# Altium PCB motion_tracker.PcbDoc
Units mil, origin at the board's own origin, x right, y up, seen from the top; angles counter-clockwise.
Board outline 1985 x 1590 mil, 2 copper layers (Top Layer, Bottom Layer); 37 components, 22 nets, 155 pads, 73 vias.
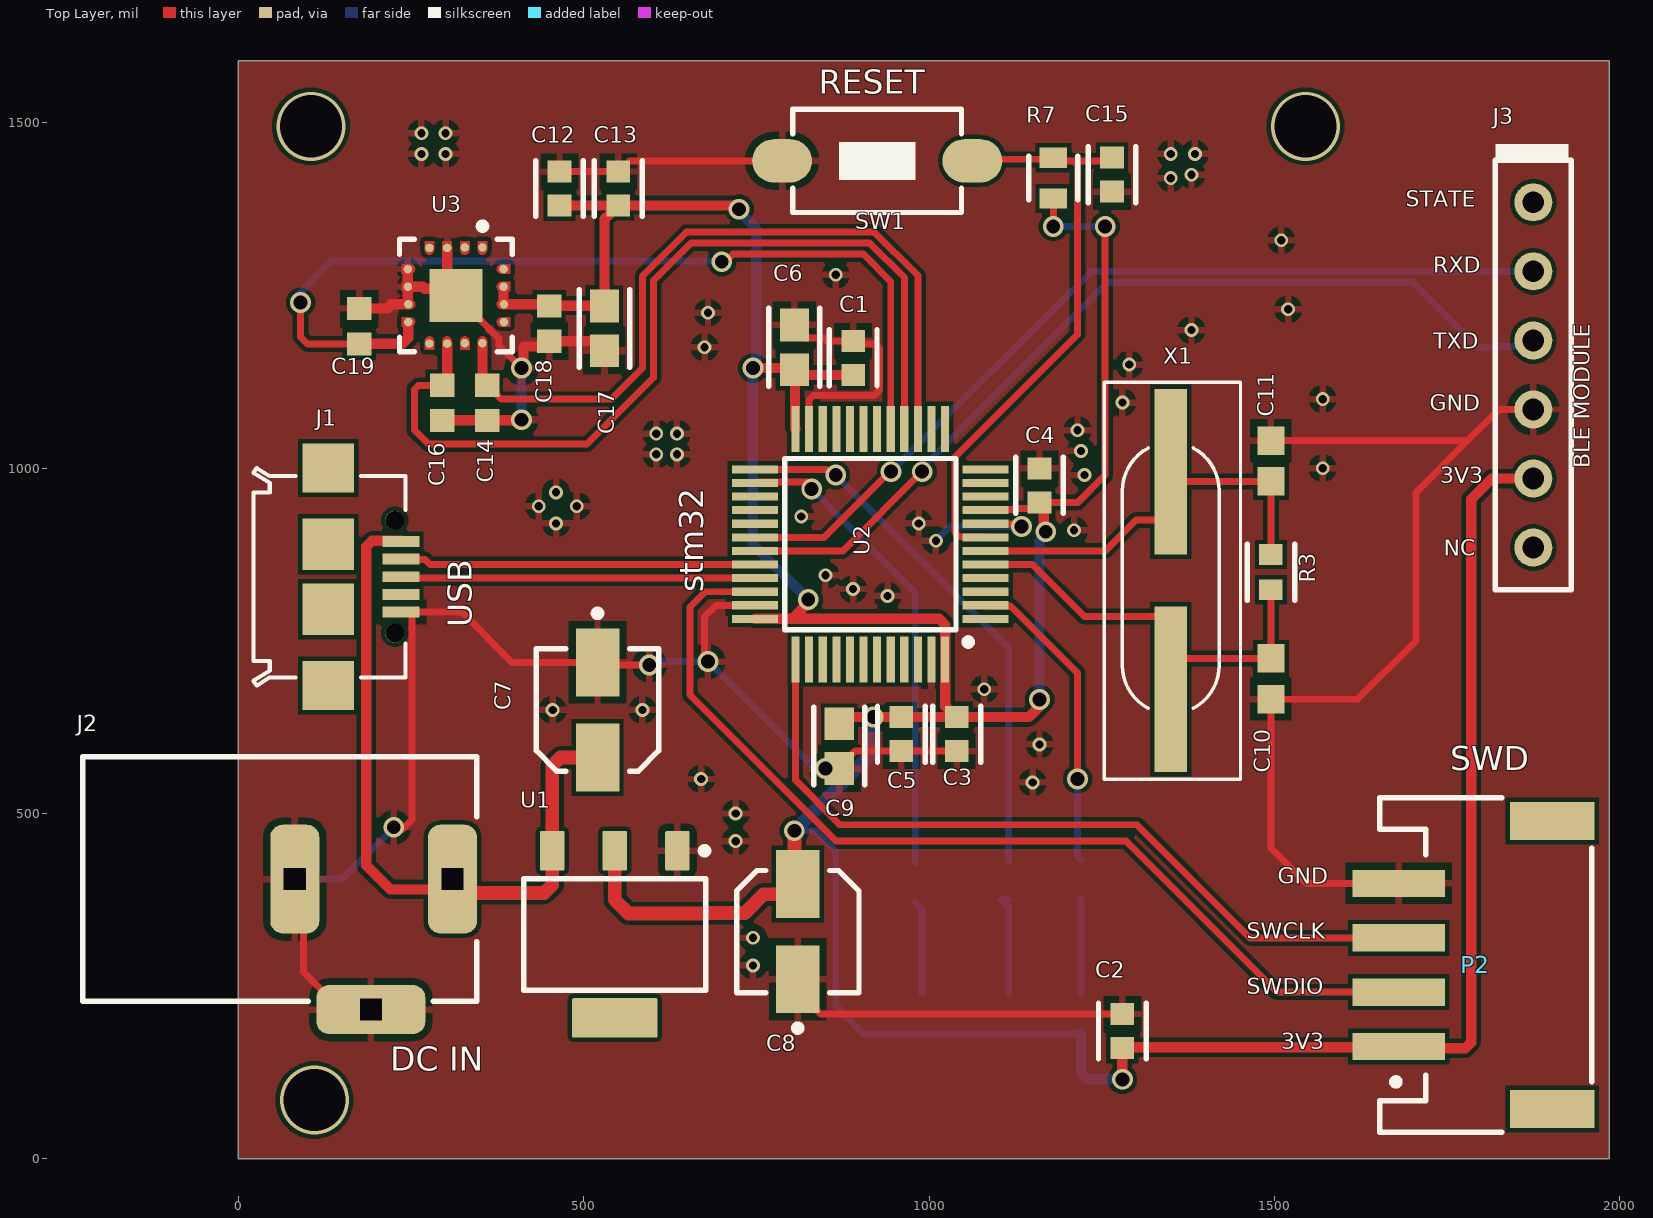
[diagram p0: Top Layer view]
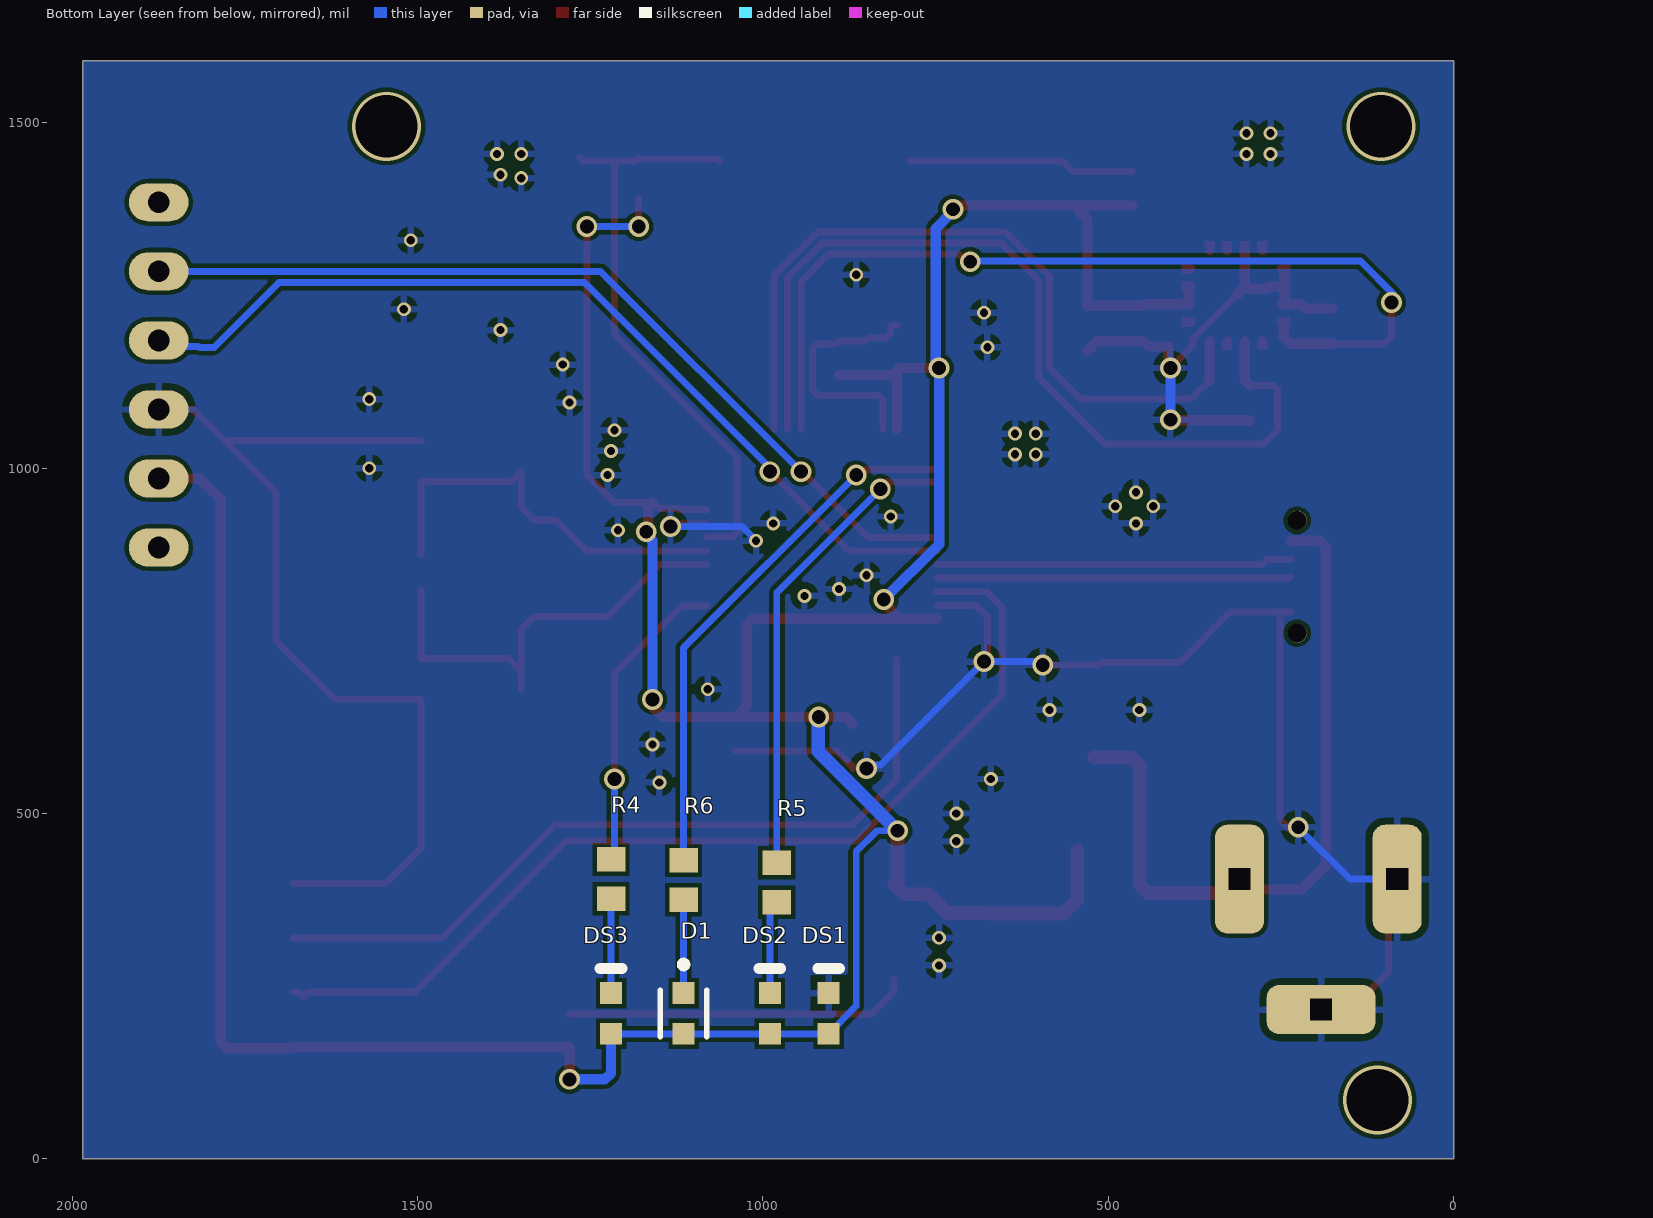
[diagram p1: Bottom Layer view, seen from below]

## Layer stack, top to bottom
Top Solder: solder mask 0.4, Solder Resist, Dk 3.5
Top Layer: signal copper 1.4
Dielectric 1: dielectric 12.6, FR-4, Dk 4.8
Bottom Layer: signal copper 1.4
Bottom Solder: solder mask 0.4, Solder Resist, Dk 3.5

## Board outline
0,0 1985,0 1985,1590 0,1590

## Design rules (kind name [scope] priority, off if disabled: settings)
Clearance [All] p1: gap=6 ignorepadtopadclearanceinfootprint=TRUE
DiffPairsRouting [InDifferentialPairClass('diff_90')] p1: maxlimit=10 minlimit=5 mostfreqgap=5 toplayer_minwidth=10 toplayer_maxwidth=10 toplayer_prefwidth=10 bottomlayer_minwidth=10 bottomlayer_maxwidth=10 bottomlayer_prefwidth=10 maxuncoupledlength=500
PolygonConnect [All] p1: connectstyle=Relief reliefconductorwidth=10 reliefentries=4 polygonreliefangle="90 Angle" airgapwidth=10
RoutingVias [All] p1: holewidth=20 width=30 viastyle="Through Hole" minholewidth=20 minwidth=30 maxholewidth=20 maxwidth=30
SolderMaskExpansion [All] p1: expansion=4 istentingtop=FALSE
Width [All] p1: maxlimit=50 minlimit=6 preferedwidth=10
29 further rules are at their usual default settings.

## Classes and differential pairs
differential pair class diff_90: USBD
net class diff_90: USBD_N USBD_P
differential pair USBD: +USBD_P -USBD_N

## Components (designator, comment, footprint, x,y, rotation, side; value= is the part's Value field where it differs from the comment)
C1 "100nF" FP-0603-L_1_6_0_15-W_0_81-IPC_C 890,1159.64 r90 top
C2 "100nF" FP-0603-L_1_6_0_15-W_0_81-IPC_C 1280,185 r90 top
C3 "100nF" FP-0603-L_1_6_0_15-W_0_81-IPC_C 1040,615 r270 top
C4 "100nF" FP-0603-L_1_6_0_15-W_0_81-IPC_C 1160,975 r90 top
C5 "100nF" FP-0603-L_1_6_0_15-W_0_81-IPC_C 960,615 r270 top
C6 "4.7uF" FP-0603-L_1_6_0_15-W_0_81-IPC_A 805,1175 r90 top
C7 "EEEFP1C100AR" FP-FPB-MFG 520,650 r270 top
C8 "EEEFP1C100AR" FP-FPB-MFG 810,328.9 r90 top
C9 "4.7uF" FP-0603-L_1_6_0_15-W_0_81-IPC_A 870,597.49 r270 top
C10 "20pF" CAPC1608X90X35NL15T15 1495,695 r90 top
C11 "20pF" CAPC1608X90X35NL15T15 1495,1010.47 r270 top
C12 "10nF" FP-0603-L_1_6_0_15-W_0_81-IPC_C 465,1405 r270 top
C13 "1uF" FP-0603-L_1_6_0_15-W_0_81-IPC_C 550,1405 r270 top
C14 "0.1uF" CAPC1608X90X35LL15T15 360,1094.41 r90 top
C15 "105uF" FP-0603-L_1_6_0_15-W_0_81-IPC_C 1265,1425 r270 top
C16 "0.1uF" CAPC1608X90X35LL15T15 295,1094.41 r90 top
C17 "4.7uF" FP-0603-L_1_6_0_15-W_0_81-IPC_A 530,1202.49 r270 top
C18 "0.1uF" CAPC1608X90X35LL15T15 450,1209.41 r90 top
C19 "0.1uF" CAPC1608X90X35LL15T15 175,1205.59 r270 top
D1 "GREEN" FP-LTST-C190GKT-MFG 1115,210.47 r270 bottom
DS1 "POWER" AVAG-HSMX-C190_V 905,210.47 r90 bottom
DS2 "Yellow" AVAG-HSMX-C190_V 990,210.47 r90 bottom
DS3 "POWER" AVAG-HSMX-C190_V 1220,210.47 r90 bottom
J1 "Micro USB 2.0 Type B" 629105136821 130,842.76 r270 top
J2 "694106301002" 694106301002 60,405 r270 top
J3 "HDRF6" HDRLP_F_1X6 1875,1135 r270 top
P2 "620104131822" 620104131822 1805.98,280.63 r90 top
R3 "1M" FP-ERJ3EK-IPC_C 1495,849.38 r270 top
R4 "510R" RESC1608X55X30ML15T15 1220,405 r90 bottom
R5 "510R" RESC1608X55X30ML15T15 980,400 r90 bottom
R6 "510R" RESC1608X55X30ML15T15 1115,403.54 r90 bottom
R7 "10K" FP-CRCW0603-HPe3-MFG 1180,1420 r270 top
SW1 "Tactile 2PIN 6X3.5mm H4.57mm (SMD)" SWPBS_SPST_6X3X5 925,1445 r0 top
U1 "LM1117MPX-3.3/NOPB" DCY0004A_L 545,325 r270 top
U2 "STM32F103C8T6" LQFP-48_19.6_393_58X11_SMD 915,890 r180 top
U3 "ADXL335BCPZ-RL7" FP-CP-16-14-MFG 315,1250 r270 top
X1 "8Mhz" XTAL_314_240X47_SMD 1350,994.96 r270 top

## Footprints (in the part's own frame and the unit in brackets; to place one, negate y for a bottom-side part, rotate by r counter-clockwise, add the part's x,y. Pads: shape width x height; smd on the part's side, far side on the other; paste and mask are expansions set on the pad)
620104131822 [mm] "2.00mm SMT Male Horizontal Shrouded Header, 4p"
  rect 1x3.4 smd: 1(-3,3.2) 2(-1,3.2) 3(1,3.2) 4(3,3.2)
  rect 1.4x3.1 smd: MP1(-5.3,-2.45) MP2(5.3,-2.45)
  silkscreen extent -6.15,-3.9 6.15,3.9, body extent -6,-3.8 6,4.8, height 5.57
629105136821 [mm] "Micro USB 2.0 SMT Type B Horizontal 5 Contacts"
  rect 0.4x1.35 smd: 1(-1.3,2.675) 2(-0.65,2.675) 3(0,2.675) 4(0.65,2.675) 5(1.3,2.675)
  round 0.7 hole 0.7 unplated: M1(-2.075,2.45) M2(2.075,2.45)
  rect 1.8x1.9 smd: S1(-4,0) S4(4,0)
  rect 1.9x1.9 smd: S2(-1.2,0) S3(1.2,0)
  silkscreen extent -4,-2.75 4,2.85, body extent -4,-2.73 4,3.17, height 2.77
694106301002 [mm] "DC Power Jack Right Angled(6.4)"
  rrect50% 4x1.8 hole 0.8 square: 1(0,6.35) 2(0,0.55)
  rrect50% 1.8x4 hole 0.8 square: 3(4.8,3.35)
  silkscreen extent -4.5,-7.25 4.5,7.25, body extent -4.5,-7.25 5,7.25, height 10.75
AVAG-HSMX-C190_V [mm] "SMD, 2-Leads, Body 1.6x0.8mm, Height 0.9mm"
  rect 0.8x0.8 smd: 1(-0.75,0) 2(0.75,0)
  silkscreen extent 1.65,-0.4 1.65,0.4, body extent -0.8,-0.4 0.8,0.4, height 0.9
CAPC1608X90X35LL15T15 [mm] "Chip Capacitor, 2-Leads, Body 1.60x0.81mm, IPC High Density"
  rect 0.85x0.9 smd: 1(-0.65,0) 2(0.65,0)
  body extent -0.88,-0.48 0.87,0.48, height 0.9
CAPC1608X90X35NL15T15 [mm] "Chip Capacitor, 2-Leads, Body 1.60x0.81mm, IPC Medium Density"
  rect 1.05x1 smd: 1(-0.75,0) 2(0.75,0)
  body extent -0.88,-0.48 0.87,0.48, height 0.9
DCY0004A_L [mm] "SOT223, 4-Leads, Body 6.7x3.7mm, Pitch 2.3mm, IPC High Density"
  rrect11% 1.45x0.9 smd: 1(-3.075,2.3) 2(-3.075,0) 3(-3.075,-2.3)
  rrect7% 1.45x3.15 smd: 4(3.075,0)
  silkscreen extent -3.2,-3.35 2.05,3.43, body extent -3.5,-3.25 3.5,3.25, height 1.62
FP-0603-L_1_6_0_15-W_0_81-IPC_A [mil]
  rect 47.5x42.06 smd paste+0 mask+0: 1(-32.51,0) 2(32.51,0)
  silkscreen extent -56,-37 56,37, body extent -76,-41 76,41, height 10
FP-0603-L_1_6_0_15-W_0_81-IPC_C [mil]
  rect 31.75x34.18 smd paste+0 mask+0: 1(-24.64,0) 2(24.64,0)
  silkscreen extent -41,-35 41,35, body extent -44,-23 44,23, height 10
FP-CP-16-14-MFG [mm]
  round 0.315 smd paste+0 mask+0: 1(-1.767,0.975) 2(-1.767,0.325) 3(-1.75,-0.325) 4(-1.75,-0.975) 5(-0.975,-1.767) 6(-0.325,-1.767) 7(0.325,-1.75) 8(0.975,-1.75) 9(1.767,-0.975) 10(1.767,-0.325) 11(1.75,0.325) 12(1.75,0.975) 13(0.975,1.767) 14(0.325,1.767) 15(-0.325,1.75) 16(-0.975,1.75)
  rect 1.95x1.95 smd paste+0 mask+0: 17(0,0)
  Top Layer region: -0.8,2 -0.8,1.675 -0.813,1.608 -0.851,1.551 -0.908,1.513 -0.975,1.5 -0.975,1.5 -1.042,1.513 -1.099,1.551 -1.137,1.608 -1.15,1.675 -1.15,1.675 -1.15,2
  Top Layer region: -0.15,2 -0.15,1.675 -0.173,1.587 -0.238,1.523 -0.325,1.5 -0.325,1.5 -0.392,1.513 -0.449,1.551 -0.487,1.608 -0.5,1.675 -0.5,1.675 -0.5,2
  Top Layer region: 0.5,2 0.5,1.675 0.477,1.587 0.413,1.523 0.325,1.5 0.325,1.5 0.258,1.513 0.201,1.551 0.163,1.608 0.15,1.675 0.15,1.675 0.15,2
  Top Layer region: 1.15,2 1.15,1.675 1.127,1.588 1.062,1.523 0.975,1.5 0.975,1.5 0.908,1.513 0.851,1.551 0.813,1.608 0.8,1.675 0.8,1.675 0.8,2
  Top Layer region: 2,0.8 1.675,0.8 1.608,0.813 1.551,0.851 1.513,0.908 1.5,0.975 1.5,0.975 1.513,1.042 1.551,1.099 1.608,1.137 1.675,1.15 1.675,1.15 2,1.15
  Top Layer region: 2,0.15 1.675,0.15 1.608,0.163 1.551,0.201 1.513,0.258 1.5,0.325 1.5,0.325 1.513,0.392 1.551,0.449 1.608,0.487 1.675,0.5 1.675,0.5 2,0.5
  Top Layer region: 2,-0.5 1.675,-0.5 1.608,-0.487 1.551,-0.449 1.513,-0.392 1.5,-0.325 1.5,-0.325 1.513,-0.258 1.551,-0.201 1.608,-0.163 1.675,-0.15 1.675,-0.15 2,-0.15
  Top Layer region: 2,-1.15 1.675,-1.15 1.608,-1.137 1.551,-1.099 1.513,-1.042 1.5,-0.975 1.5,-0.975 1.513,-0.908 1.551,-0.851 1.608,-0.813 1.675,-0.8 1.675,-0.8 2,-0.8
  Top Layer region: 0.8,-2 0.8,-1.675 0.813,-1.608 0.851,-1.551 0.908,-1.513 0.975,-1.5 0.975,-1.5 1.042,-1.513 1.099,-1.551 1.137,-1.608 1.15,-1.675 1.15,-1.675 1.15,-2
  Top Layer region: 0.15,-2 0.15,-1.675 0.163,-1.608 0.201,-1.551 0.258,-1.513 0.325,-1.5 0.325,-1.5 0.392,-1.513 0.449,-1.551 0.487,-1.608 0.5,-1.675 0.5,-1.675 0.5,-2
  Top Layer region: -0.5,-2 -0.5,-1.675 -0.487,-1.608 -0.449,-1.551 -0.392,-1.513 -0.325,-1.5 -0.325,-1.5 -0.258,-1.513 -0.201,-1.551 -0.163,-1.608 -0.15,-1.675 -0.15,-1.675 -0.15,-2
  Top Layer region: -1.15,-2 -1.15,-1.675 -1.137,-1.608 -1.099,-1.551 -1.042,-1.513 -0.975,-1.5 -0.975,-1.5 -0.908,-1.513 -0.851,-1.551 -0.813,-1.608 -0.8,-1.675 -0.8,-1.675 -0.8,-2
  Top Layer region: -2,-0.8 -1.675,-0.8 -1.608,-0.813 -1.551,-0.851 -1.513,-0.908 -1.5,-0.975 -1.5,-0.975 -1.513,-1.042 -1.551,-1.099 -1.608,-1.137 -1.675,-1.15 -1.675,-1.15 -2,-1.15
  Top Layer region: -2,-0.15 -1.675,-0.15 -1.608,-0.163 -1.551,-0.201 -1.513,-0.258 -1.5,-0.325 -1.5,-0.325 -1.523,-0.413 -1.587,-0.477 -1.675,-0.5 -1.675,-0.5 -2,-0.5
  Top Layer region: -2,0.5 -1.675,0.5 -1.608,0.487 -1.551,0.449 -1.513,0.392 -1.5,0.325 -1.5,0.325 -1.523,0.238 -1.587,0.173 -1.675,0.15 -1.675,0.15 -2,0.15
  Top Layer region: -2,1.15 -1.675,1.15 -1.608,1.137 -1.551,1.099 -1.513,1.042 -1.5,0.975 -1.5,0.975 -1.513,0.908 -1.551,0.851 -1.608,0.813 -1.675,0.8 -1.675,0.8 -2,0.8
  silkscreen extent -2.67,-2.07 2.07,2.07, body extent -2.17,-2.17 2.17,2.17, height 0.25
FP-CRCW0603-HPe3-MFG [mm]
  rect 0.75x1 smd paste+0 mask+0: 1(-0.75,0) 2(0.75,0)
  silkscreen extent -0.8,-0.9 0.8,0.9, body extent -1.22,-0.6 1.22,0.6, height 0.25
FP-ERJ3EK-IPC_C [mil]
  rect 29.78x33.94 smd paste+0 mask+0: 1(-25.62,0) 2(25.62,0)
  silkscreen extent -41,-34 41,34, body extent -44,-23 44,23, height 10
FP-FPB-MFG [mm]
  rect 2.5x1.6 smd paste+0 mask+0: 1(-1.75,0) 2(1.75,0)
  silkscreen extent -3.67,-2.25 2.25,2.25, body extent -3.25,-2.5 3.25,2.5, height 0.25
FP-LTST-C190GKT-MFG [mm]
  rect 0.8x0.8 smd paste+0 mask+0: 1(-0.75,0) 2(0.75,0)
  silkscreen extent -1.92,-0.85 0.85,0.85, body extent -0.8,-0.4 0.8,0.4, height 0.9
HDRLP_F_1X6 [mm] "Connector Socket, Single-row 1-position, 0.100\" pitch"
  round 1.4 / inner round 1.4 / far side oval 1.4x2.2 hole 0.8 mask+0.1: 1(-6.35,0) 2(-3.81,0) 3(-1.27,0) 4(1.27,0) 5(3.81,0) 6(6.35,0)
  silkscreen extent -8.5,-1.4 7.9,1.4, body extent -7.81,-1.27 7.81,1.27, height 4.19
LQFP-48_19.6_393_58X11_SMD [mm] "48LQFP"
  rect 1.7x0.3 smd mask+0.076: 1(-4.238,2.75) 2(-4.238,2.25) 3(-4.238,1.75) 4(-4.238,1.25) 5(-4.238,0.75) 6(-4.238,0.25) 7(-4.238,-0.25) 8(-4.238,-0.75) 9(-4.238,-1.25) 10(-4.238,-1.75) 11(-4.238,-2.25) 12(-4.238,-2.75) 25(4.238,-2.75) 26(4.238,-2.25) 27(4.238,-1.75) 28(4.238,-1.25) 29(4.238,-0.75) 30(4.238,-0.25) 31(4.238,0.25) 32(4.238,0.75) 33(4.238,1.25) 34(4.238,1.75) 35(4.238,2.25) 36(4.238,2.75)
  rect 0.3x1.7 smd mask+0.076: 13(-2.75,-4.238) 14(-2.25,-4.238) 15(-1.75,-4.238) 16(-1.25,-4.238) 17(-0.75,-4.238) 18(-0.25,-4.238) 19(0.25,-4.238) 20(0.75,-4.238) 21(1.25,-4.238) 22(1.75,-4.238) 23(2.25,-4.238) 24(2.75,-4.238) 37(2.75,4.238) 38(2.25,4.238) 39(1.75,4.238) 40(1.25,4.238) 41(0.75,4.238) 42(0.25,4.238) 43(-0.25,4.238) 44(-0.75,4.238) 45(-1.25,4.238) 46(-1.75,4.238) 47(-2.25,4.238) 48(-2.75,4.238)
  silkscreen extent -3.73,-3.15 3.15,3.72, body extent -4.5,-4.5 4.5,4.5, height 1.7
RESC1608X55X30ML15T15 [mm] "Chip Resistor, 2-Leads, Body 1.60x0.80mm, IPC Low Density"
  rect 0.9x1.05 smd: 1(-0.725,0) 2(0.725,0)
  body extent -0.87,-0.48 0.87,0.48, height 0.55
SWPBS_SPST_6X3X5 [mm] "SWITCH, PUSHBUTTON, SMD, SPST, 6X3.5mm, SKQMBBE010, 50000 Cycles, 1.57N Force"
  oval 2.2x1.6 smd mask+0.1: 1(-3.5,0) 2(3.5,0)
  silkscreen extent -3.1,-1.9 3.1,1.9, body extent -3.65,-1.75 3.65,1.75, height 5
XTAL_314_240X47_SMD [mm] "CASE: TH"
  rect 6.096x1.2 smd: 1(0,0) 2(8,0)
  silkscreen extent -3.29,-2.44 11.32,2.57, body extent -2.99,-2.27 10.9,2.41, height 3.05

## Part data
C1 C2 C3 C4 C5: library part CMP-2006-04386-2, "Automotive Ceramic Capacitor, 0603, 100nF, 10%, X7R, 15%, 50V", Case Code (Imperial)=0603, Case Code (Metric)=1608, Dielectric=X7R, Dielectric Material=Ceramic, Insulation Resistance=100GR, Max Operating Temperature=125°C, Min Operating Temperature=-55°C, Package Quantity=1, Ratings=AEC-Q200, Tolerance=10%, Voltage=50V, Capacitance=100nF, Case/Package=0603, Construction=Flat, Contact Plating=Tin, Depth=0.81mm, Dissipation Factor=2.5%, Height=0.9mm, Lead Free="Lead Free", Length=1.6mm, Mount="Surface Mount", Number of Pins=2, Packaging="Tape and Reel", Radiation Hardening=No, REACH SVHC="No SVHC", RoHS Compliant=Yes, Series=-, Termination=SMD/SMT, Thickness=0.035inch, Voltage Rating=50V, Voltage Rating (DC)=50V, Width=0.032inch
C6 C9 C17: library part CMP-2006-04482-2, "General Purpose Ceramic Capacitor, 0603, 4.7uF, 20%, X5R, 15%, 6.3V", Case Code (Imperial)=0603, Case Code (Metric)=1608, Dielectric=X5R, Dielectric Material=Ceramic, Insulation Resistance=10GR, Max Operating Temperature=85°C, Min Operating Temperature=-55°C, Package Quantity=1, Tolerance=20%, Voltage=6.3V, Capacitance=4.7uF, Case/Package=0603, Construction=Flat, Contact Plating=Tin, Depth=0.81mm, Dissipation Factor=12.5%, Height=0.9mm, Lead Free="Lead Free", Length=1.6mm, Mount="Surface Mount", Number of Pins=2, Packaging="Tape and Reel", Radiation Hardening=No, REACH SVHC="No SVHC", RoHS Compliant=Yes, Series=-, Size=0.94mm, Termination=SMD/SMT, Thickness=0.035inch, Voltage Rating=6.3V, Voltage Rating (DC)=6.3V, Width=0.032inch
C7 C8: library part CMP-00287-07742837-1, "EEEFP1C100AR Aluminum Electrolytic Capacitor, 10 uF, 16 V, ± 20%, 2000 hours @ 105°C, Radial Can - SMD", Capacitance=10µF, Case/Package=Radial, ESR (Equivalent Series Resistance)=850mΩ, Leakage Current=3µA, Max Operating Temperature=105°C, Min Operating Temperature=-55°C, Ripple Current=160mA, Tolerance=20%, Voltage=16V, Contact Plating=Tin, Diameter=4mm, Dissipation Factor=16%, Features="High Temperature", Height=5.8mm, Height - Seated (Max)=5.7912mm, Lead Free="Lead Free", Lead Pitch=1mm, Length=6.1mm, Life (Hours)=2000hours, Lifecycle Status=Production, Material=Aluminium, Mount="PCB, Surface Mount", NexarPartId=7742837, Number of Pins=2, Packaging="Cut Tape", Radiation Hardening=No, REACH SVHC="No SVHC", Ripple Current (AC)=160mA, RoHS=Compliant, Schedule B="8532220020, 8532220020", Termination=SMD/SMT, Voltage Rating=16V, Voltage Rating (DC)=16V
C10 C11: library part CMP-2006-04264-1, Manufacturer="AVX Interconnect / Elco", Part Number=06035A200JAT2A
C12 C13 C15: library part CMP-2006-04386-2, "Automotive Ceramic Capacitor, 0603, 100nF, 10%, X7R, 15%, 50V", Capacitance=100nF, Case Code (Imperial)=0603, Case Code (Metric)=1608, Dielectric=X7R, Dielectric Material=Ceramic, Insulation Resistance=100GR, Max Operating Temperature=125°C, Min Operating Temperature=-55°C, Package Quantity=1, Ratings=AEC-Q200, Tolerance=10%, Voltage=50V, Case/Package=0603, Construction=Flat, Contact Plating=Tin, Depth=0.81mm, Dissipation Factor=2.5%, Height=0.9mm, Lead Free="Lead Free", Length=1.6mm, Mount="Surface Mount", Number of Pins=2, Packaging="Tape and Reel", Radiation Hardening=No, REACH SVHC="No SVHC", RoHS Compliant=Yes, Series=-, Termination=SMD/SMT, Thickness=0.035inch, Voltage Rating=50V, Voltage Rating (DC)=50V, Width=0.032inch
C14 C16 C18 C19: library part CMP-2006-02168-1, Manufacturer="AVX Interconnect / Elco", Part Number=LD035C104KAB2A
D1: library part CMP-22017-000005-2, "LED GREEN CLEAR CHIP SMD", Case Code (Imperial)=0603, Case Code (Metric)=1608, Color=Green, Forward Current=30mA, Forward Voltage=2.1V, Lens Color=Colorless, Max Operating Temperature=85°C, Min Operating Temperature=-55°C, Package Quantity=1, Power Dissipation=100mW, Reverse Voltage=5V, Test Current=10mA, Voltage=2V, Case/Package=0603, Depth=0.8mm, Dominant Wavelength=569nm, Height=0.8mm, Illumination Color=Green, Lead Free="Lead Free", Length=1.6mm, Lens Style=Clear, Lens Transparency=Clear, Luminous Intensity=6mcd, Mount="Surface Mount", Number of Elements=1, Number of LEDs=1, Number of Pins=2, Packaging="Tape and Reel", Power Rating=100mW, Radiation Hardening=No, Viewing Angle=130°, Wavelength=565nm, Width=0.8mm
DS1 DS3: library part CMP-2000-06427-1, "LED Uni-Color Red, 52 mW, 20 mA, -40 to 85 degC, 2-Pin SMD, RoHS, Tape and Reel", Emitting Color=Red, Forward Current=25mA, Forward Voltage=2.6V, Manufacturer=Avago, Operating Temp Range=-40Cto85C, Operating Temperature Classification=Industrial, Package Description="2-Pin Surface Mount Device, Body 1.6 x 0.8 mm, Height 0.9 mm", Package Reference=HSMX-C190, Package Type=ChipLed, Power Dissipation=52W, Reverse Voltage=5V, Test Current (It)=20mA, Chip Material=GaP, Datasheet URL=http://docs.avagotech.com/docs/AV02-0551EN, Datasheet Version=03/2012, DELETED=Compliant, Dominant Wave Length=626nm, High Brightness=No, Lens Dimensions=1x0.8x0.5mm, Lens Type=ColorlessDiffused, Lum Intensity=10mcd, Luminous Intensity=10mcd, Main Category=ChipLED, Manufacturer URL=http://www.avagotech.com/, Mounting=SurfaceMount, Mounting Technology=SurfaceMount, Number of  Elements=1, Packaging=TapeandReel, Peak Wavelength=630nm, Pin Count=2, Product Depth (mm)=0.8mm, Product Height (mm)=0.8mm, Product Length (mm)=1.6mm, Rad Hardened=No, Shape Type=Rectangular, Type=Uni-Color, Viewing Angle=170deg
DS2: library part CMP-1744-00003-1, "LED Uni-Color Yellow, 65 mW, 20 mA, -40 to 85 degC, 2-Pin SMD, RoHS, Tape and Reel", Case Code (Imperial)=0603, Case Code (Metric)=1608, Max Operating Temperature="155 degC", Min Operating Temperature="-55 degC", Package Quantity=5000, Power Rating="100 mW", Resistance="390 Ohm", Tolerance=1%, Voltage Rating="50 V", Case\Package=0603, ComponentLink1Description="Manufacturer URL", ComponentLink1URL=http://www.avagotech.com/, ComponentLink2Description=Datasheet, ComponentLink2URL=http://docs.avagotech.com/docs/AV02-0551EN, ComponentLink3Description="Package Specification", ComponentLink3URL=http://www.fairchildsemi.com/dwg/MA/MA03D.pdf, DatasheetVersion=Mar-12, Height="0.45 mm", Length="1.6 mm", Mount="Surface Mount", PackageDescription="2-Pin Surface Mount Device, Body 1.6 x 0.8 mm, Height 0.9 mm", PackageReference=HSMX-C190, Packaging="Tape and Reel", Pins=2, REACH SVHC="No SVHC", RoHSCompliant=true, Voltage Rating (DC)="50 V", Width="0.8 mm"
J1: library part "Micro USB 2.0 Type B Horizonta (SMD) 629105136821", "Micro USB 2.0 Type B Horizontal SMT 5 Contacts WR-COM", Operating Temperature="-40 to 85 degC", PartNumber=629105136821, Rated Current="1 A", ComponentLink1Description=Manufacturer, ComponentLink1URL=http://www.we-online.de, ComponentLink2Description=Datasheet, ComponentLink2URL=http://katalog.we-online.de/em/datasheet/629105136821.pdf, Gender=Female, Interface Type="Micro USB 2.0 Type B", Mounting Technology=SMT, Orientation=Horizontal, Packaging="Tape and Reel", Published Date="May 2018", Publisher="Wurth Elektronik"
J2: library part CMP-1502-00188-2, Color=Black, Current Rating=5A, Flammability Rating="UL94 V-0", Insulation Resistance=100MΩ, Max Operating Temperature=85°C, Min Operating Temperature=-40°C, Operating Supply Voltage=24V, Voltage Rating (DC)=20V, Connector Type=Power, Contact Gender=Female, Contact Material="Gold, Tin", Contact Plating=Tin, Gender=Male, Height=11mm, Housing Material=Polyamide, Mount="Through Hole", NexarPartId=52676100, Number of Contacts=3, Packaging=Bulk, REACH SVHC=Unknown, RoHS=Compliant, Shielding=Unshielded, Termination="Through Hole", Voltage Rating=24V
J3: library part HDRLP_F_1X6, "CONN, HEADER, Male, pitch: 2.54mm, 6POS"
P2: library part CMP-1502-00671-2, Color="Beige, White", Contact Resistance=20mΩ, Current Rating=2A, Flammability Rating="UL94 V-0", Insulation Resistance=1GΩ, Max Operating Temperature=85°C, Min Operating Temperature=-40°C, Operating Supply Voltage=100V, Voltage Rating=125V, Connector Type="Male Pin", Contact Gender=Male, Contact Material=Copper, Contact Mating Length=3.683mm, Contact Plating=Tin, Gender=Male, Height=5.6mm, Housing Material=Nylon, Insulation=Insulated, Lead Free="Lead Free", Lead Pitch=2mm, Length=12mm, Mount="Surface Mount", NexarPartId=18818240, Number of Contacts=4, Number of Pins=4, Number of Positions=4, Number of Rows=1, Packaging="Tape and Reel", Pitch=2mm, REACH SVHC=Unknown, RoHS=Compliant, Termination=SMD/SMT, Width=12mm
R3: library part CMP-1012-00849-3, "RES SMD 1M OHM 1% 1/10W 0603", Case Code (Imperial)=0603, Case Code (Metric)=1608, Max Operating Temperature=155°C, Max Power Dissipation=100mW, Min Operating Temperature=-55°C, Package Quantity=1, Resistance=1MR, Resistance Tolerance=1%, Resistor Type="Thick Film", Temperature Coefficient=100ppm/°C, Voltage Rating=75V, Case/Package=0603, Construction=Rectangular, Contact Plating=Tin, Depth=0.8mm, Features="Automotive AEC-Q200", Height=0.022inch, Lead Free="Lead Free", Length=1.6mm, Military Standard=Not, Mount="Surface Mount", Number of Pins=2, Number of Terminations=2, Packaging="Tape and Reel", Power Rating=100mW, Radiation Hardening=No, REACH SVHC="No SVHC", RoHS Compliant=Yes, Series=ERJ, Size Code=0603, Termination=SMD/SMT, Tolerance=1%, Voltage Rating (DC)=75V, Width=0.8mm
R4 R5 R6: library part CMP-2000-00802-1, Manufacturer=Panasonic, Part Number=ERJ-3GEYJ511V
R7: library part CMP-2000-03835-2, "RES SMD 10K OHM 1% 1/3W 0603", Case Code (Imperial)=0603, Case Code (Metric)=1608, Max Operating Temperature=155°C, Max Power Dissipation=250mW, Min Operating Temperature=-55°C, Package Quantity=10, Resistance=10kR, Temperature Coefficient=100ppm/°C, Tolerance=1%, Voltage Rating=75V, Case/Package=0603, Composition="Thick Film", Contact Plating=Tin, Depth=0.85mm, Features="Automotive AEC-Q200", Height=0.45mm, Lead Free="Lead Free", Length=1.6mm, Military Standard=Not, Number of Terminations=2, Packaging="Tape and Reel", Power Rating=250mW, Radiation Hardening=No, Termination=SMD/SMT, Voltage Rating (DC)=75V, Weight=7.1E-05oz, Width=0.033inch
SW1: "Tactile Switch SPST-NO Top Actuated Surface Mount", PartNumber=FSMSMTR-ND
U1: library part CMP-0062-01639-4, "800mA Low-Dropout Linear Regulator, 4-pin SOT-223, Pb-Free", Manufacturer="Texas Instruments", PackageTopMarking=XYTT*N05A, PowerWise=N, Code_IPC=SOT223-4, Code_JEDEC=TO-261-AA, ComponentLink1Description="Datasheet URL", ComponentLink1URL=http://www.ti.com/general/docs/lit/getliterature.tsp?genericPartNumber=LM1117-N&fileType=pdf, CompType="LDO IC", High-Reliability=Y, PackageDescription="Molded SOT-223, 6.50 x 3.56 x 1.6mm Body, 4 Lead, 2.3mm Pitch", PackageReference=DCY0004A, PartNumber=LM1117MPX-3.3/NOPB, PinCount=4, RoHS=Y
U2: library part IC_STM32F103C8T6, "ARM® Cortex®-M3 STM32F1 Microcontroller IC 32-Bit 72MHz 64KB (64K x 8) FLASH 48-LQFP (7x7)", Alternate Part Number-1=NA, Case/Package=LQFP48, Manufacturer=STMicroelectronics, Manufacturer Part Number=STM32F103C8T6, Supplier Part Number-1=STM32F103C8T6, Supplier-1=LCSC
U3: library part CMP-0885-00044-2, "ACCELEROMETER 3G ANALOG 16LFCSP", Case/Package="LFCSP EP", Max Operating Temperature=85°C, Max Supply Voltage=3.6V, Min Operating Temperature=-40°C, Min Supply Voltage=1.8V, Nominal Supply Current=350uA, Package Quantity=1000, -3db Bandwidth=1.6kHz, Axis="X, Y, Z", Bandwidth=550Hz, Contact Plating=Tin, Depth=4mm, Lead Free="Contains Lead", Length=4mm, Number of Pins=16, Operating Supply Current=350uA, Output Type=Analog, Packaging="Tape and Reel", Radiation Hardening=No, Sensitivity=300mV/g
X1: library part XTAL_8MHZ-ECS-80-32-5PX-SMD, "8MHz ±30ppm Crystal 32pF 60 Ohms HC-49/US", Alternate Part Number-1=NA, Case/Package=SMD/SMT, Manufacturer="Fox Electronics", Manufacturer Part Number=ECS-80-32-5PX-TR, Supplier Part Number-1=ECS-80-32-5PX-TR, Supplier-1="SP ROAD"

## Via types
v1: diameter 20, hole 12, Top Layer to Bottom Layer, 46 vias
v2: diameter 30, hole 20, Top Layer to Bottom Layer, 24 vias
v3: diameter 100, hole 90, Top Layer to Bottom Layer, 3 vias

## Nets (pads, with @x,y where several pads share a name; then routed paths per layer and width w, separated by ;. In a path a pad name is that pad's centre, name@x,y a point inside that pad or via, vN(x,y) a via of type N, cw(c..) or ccw(c..) an arc to the next point about the centre after c; other vN are vias at no path point)
3V3: C1.1 C2.1 C3.1 C4.1 C5.1 C6.1 C8.2 C9.1 C12.2 C13.2 C17.1 C18.2 D1.2 DS1.1 DS2.1 DS3.1 J3.5 P2.1 R7.2 U1.2 U2.9 U2.24 U2.36 U2.48 U3.14 U3.15 | length 6050.8
  Top Layer w10: U2.9 1082.76,940.12 1121.75,940.12 1123.14,941.51 1151.15,941.51 C4.1 1215.36,950.36 1255,990 v2(1255,1350) ; v2(1180,1350) R7.2
  Top Layer w15: U3.15 383.9,1237.88 U3.14 447.8,1237.2 448.9,1236.1 C18.2 C17.1 530,1360.36 540.41,1370.77 540.41,1371.98 C13.2@548.79,1380.36 ; C12.2 C13.2@548.79,1380.36 ; v2(725,1375) 719.64,1380.36 C13.2 C13.2@548.79,1380.36 ; v2(745,1145) 802.49,1145 C6.1 C6.1@805.87,1141.62 ; U2.36 801.73,781.73 ; U2.24 805.87,1057.72 C6.1@805.87,1141.62 ; v2(825,810) 825,805 801.73,781.73 ; C9.1 879.64,639.64 v2(919.21,639.64) C5.1@958.79,639.64 ; C1.1 812.49,1135 C6.1@805.87,1141.62 ; C5.1 C3.1@1038.79,639.64 ; v2(1160,665) 1160,655 1144.64,639.64 C3.1 C3.1@1038.79,639.64 ; C4.1 1166.26,944.1 1166.26,910.94 v2(1169.13,908.07) ; v2(1280,115) C2.1 1281.08,161.44 1678.92,161.44 P2.1 1682.52,160 1776.21,160 1785,168.79 1785,955 1815,985 J3.5 ; 801.73,781.73 1014.48,781.73 1023.27,772.95 U2.48 1023.27,655.16 C3.1@1038.79,639.64
  Top Layer w20: U1.2 545,375 565,355 674.96,355 676.04,356.08 733.29,356.08 760.22,383.01 795.22,383.01 C8.2@805,392.8 ; v2(805,475) C8.2@805,392.8 ; C8.2 C8.2@805,392.8
  Bottom Layer w10: v2(805,475) 835,475 865,445 865,220.94 DS1.1 DS2.1 DS3.1 ; v2(1180,1350) v2(1255,1350)
  Bottom Layer w15: v2(725,1375) 725,1371.97 750,1346.97 750,1150 v2(745,1145) 745,890 v2(825,810) ; v2(1160,665) 1160,894.88 1169.13,904.01 v2(1169.13,908.07) ; DS3.1 1220,123.79 1228.79,115 v2(1280,115)
  Bottom Layer w20: v2(805,475) 920,590 920,638.85 v2(919.21,639.64)
GND: C1.2 C2.2 C3.2 C4.2 C5.2 C6.2 C7.1 C8.1 C9.2 C10.1 C11.1 C12.1 C13.1 C14.1 C15.2 C16.1 C17.2 C18.1 C19.1 DS1.2 J1.5 J2.2 J2.3 J3.4 P2.4 SW1.1 U1.1 U2.8 U2.23 U2.35 U2.47 U3.3 U3.5 U3.6 U3.7 U3.17 | length 5346.5
  Top Layer w10: J2.2@70,420 J2.2@81.65,408.35 ; J2.2 J2.2@81.65,408.35 ; J2.3 148.58,216.02 94.37,270.24 94.37,395.63 J2.2@81.65,408.35 ; v2(225,480) 228.36,476.64 236.64,476.64 251.24,491.24 251.24,788.7 J1.5@248.36,791.57 ; J1.5 J1.5@248.36,791.57 ; U3.17 377.28,1187.72 377.28,1177.72 407.13,1147.87 v2@412.87,1147.87 ; C12.1 C13.1 551.21,1429.64 566.57,1445 SW1.1 ; v2(595,715) 513.9,715 510,718.9 396.1,718.9 323.43,791.57 J1.5@248.36,791.57 ; v2(680,720) 675,725 675,785 691.42,801.42 U2.35 ; C6.2 812.49,1207.51 815,1205 815,1194.79 821.03,1188.76 847.23,1188.76 851.71,1184.28 C1.2 894.28,1180 922.67,1180 928.53,1174.14 928.53,1113.53 920,1105 832.83,1105 826.42,1098.58 U2.23 ; C8.1 810,242.28 842.64,209.64 C2.2 ; C9.2 870,567.69 892.67,590.36 C5.2 C3.2 ; U2.8 1116.49,919.53 1116.68,919.34 1130.08,919.34 v2(1133.91,915.51) ; C11.1 1780,1040 ; P2.4 1546.26,398.74 1495,450 C10.1 1620.47,665.47 1705,750 1705,965 1780,1040 ; J3.4 1825,1085 1780,1040
  Top Layer w15: C19.1 215.22,1231.18 221.24,1237.2 U3.7 245.43,1237.88 U3.6 ; U3.5 U3.6 ; C16.1 295.59,1069.41 408.23,1069.41 408.82,1068.82 v2(410,1070) ; U3.3 302.2,1262.8 U3.17@305,1260 ; U3.17 U3.17@305,1260 ; v2(410,1145) 412.87,1147.87 412.87,1176.21 442.39,1176.21 C18.1 516.47,1183.82 530,1170.29 C17.2 ; U3.6 267.2,1262.8 270,1260 U3.17@305,1260
  Bottom Layer w10: J2.2 150,405 v2(225,480) ; v2(595,715) 600,720 v2(680,720) 830,570 845,570 v2(850,565) ; v1(1010,895) 1030.51,915.51 v2(1133.91,915.51)
  Bottom Layer w15: v2(410,1070) v2(410,1145)
  other v1: 745,280 745,320 720,460 720,500 1150,545 670,550 1160,600 455,650 585,650 1080,680 940,815 890,825 850,845 1210,910 460,920 985,920 815,930 435,945 490,945 460,965 1225,990 1570,1000 605,1020 635,1020 1220,1025 605,1050 635,1050 1215,1055 1280,1095 1570,1100 1290,1150 675,1175 1380,1200 680,1225 1520,1230 865,1280 1510,1330 1350,1420 1380,1425 265,1455 300,1455 1350,1455 1385,1455 265,1485 300,1485
Green: R6.2 U2.25 | length 783.3
  Top Layer w10: U2.25 851.32,998.27 859.59,990 v2(865,990)
  Bottom Layer w10: v2(865,990) 865,987.29 867.71,987.29 1115,740 R6.2
NetD1_1: D1.1 R6.1 | length 149.1
  Bottom Layer w10: D1.1 1115,365 1105,375 R6.1
NetDS2_2: DS2.2 R5.1 | length 135.6
  Bottom Layer w10: R5.1 990,361.46 DS2.2
NetDS3_2: DS3.2 R4.1 | length 136.5
  Bottom Layer w10: DS3.2 R4.1
OSC_IN: C10.2 R3.2 U2.5 X1.2 | length 645.4
  Top Layer w10: U2.5 1149.53,860.47 1225,785 1331.38,785 1350,766.38 X1.2@1350,705.91 ; X1.2 X1.2@1350,705.91 ; R3.2 C10.2 1368.62,724.53 X1.2@1350,705.91
OSC_OUT: C11.2 R3.1 U2.6 X1.1 | length 602.5
  Top Layer w10: U2.6 1255.16,880.16 1300,925 1331.38,925 1350,943.62 X1.1 1364.02,980.94 C11.2 R3.1
PC13: R4.2 U2.2 | length 445.7
  Top Layer w10: U2.2 1082.76,800.51 1118,800.51 1215,703.51 v2(1215,550)
  Bottom Layer w10: v2(1215,550) 1215,438.54 R4.2
RESET: C15.1 R7.1 SW1.2 U2.7 | length 863.4
  Top Layer w10: SW1.2 1065.06,1447.26 1177.74,1447.26 R7.1 ; U2.7 1080.94,900.75 1043.24,900.75 1037.39,906.61 1037.39,1016.04 1215,1193.66 1215,1439.14 1209.14,1445 ; R7.1@1184.21,1445 1209.14,1445 ; C15.1 1260.36,1445 1209.14,1445
RXD: J3.2 U2.30 | length 1286.4
  Top Layer w10: U2.30 848.07,899.84 943.23,995 v2(945,995)
  Bottom Layer w10: v2(945,995) 1235,1285 J3.2
STATE: J3.1
SWDCLK: P2.3 U2.37 | length 1142.9
  Top Layer w10: U2.37 806.73,700.28 807.01,700 806.73,699.72 806.73,548.27 871.33,483.67 1301.33,483.67 1465,320 P2.3
SWDIO: P2.2 U2.34 | length 1440.3
  Top Layer w10: U2.34 676.1,821.1 654,799 654,671.3 865.3,460 1285,460 1503.74,241.26 1658.74,241.26 1665,235 1671.26,241.26 P2.2
TXD: J3.3 U2.31 | length 1334.3
  Top Layer w10: U2.31 875.16,880.16 v2(990,995)
  Bottom Layer w10: v2(990,995) 990,1000.41 998.43,1008.84 998.43,1009 1258.43,1269 1701,1269 1795,1175 1816.02,1175 1817.39,1176.37 1866.37,1176.37 J3.3
USBD_N: J1.2 U2.32 | length 516.1
  Top Layer w10: J1.2 236.01,867.65 270.28,867.65 277.46,860.47 U2.32
USBD_P: J1.3 U2.33 | length 513.6
  Top Layer w10: J1.3 237.28,840.79 U2.33
VIN: C7.2 J1.1 J2.1 U1.3 | length 1062.4
  Top Layer w15: J1.1 235.32,894.68 235,895 193.79,895 185,886.21 185,425 220,390 295,390 J2.1
  Top Layer w20: J2.1 330,385 442.73,385 454.45,396.72 454.45,569.39 466.16,581.1 C7.2
XOUT: C14.2 U2.15 U3.12 | length 1113.7
  Top Layer w10: C14.2 360.98,1120 372.72,1108.27 372.72,1107.28 380,1100 540,1100 585,1145 585,1278.4 648.6,1342 920.63,1342 983.9,1278.73 U2.15
  Top Layer w15: C14.2@353.39,1126.61 U3.12
Yellow: R5.2 U2.26 | length 692.6
  Top Layer w10: U2.26 748.58,978.58 750,980 824.14,980 830,974.14 v2(830,970)
  Bottom Layer w10: v2(830,970) 980,820 R5.2
YOUT: C16.2 U2.16 U3.10 | length 1325.3
  Top Layer w10: C16.2 260.78,1120 254.92,1114.14 254.92,1055.08 275,1035 505,1035 601,1131 601,1271.77 655.23,1326 914,1326 964.21,1275.79 U2.16
  Top Layer w15: C16.2 302.2,1127.2 U3.10
ZOUT: C19.2 U2.17 U3.8 | length 1362.6
  Top Layer w10: v2(90,1240) 90,1190 100,1180 C19.2 ; v2(700,1299) 704.86,1299 715.86,1310 905,1310 944.53,1270.47 U2.17
  Top Layer w15: C19.2 237.32,1180 246.1,1188.79 U3.8
  Bottom Layer w10: v2(90,1240) 86.64,1243.36 86.64,1251.64 135,1300 699,1300 v2(700,1299)
pads on no net: J1.4 J1.M1 J1.M2 J1.S1 J1.S2 J1.S3 J1.S4 J3.6 P2.MP1 P2.MP2 U1.4 U2.1 U2.3 U2.4 U2.10 U2.11 U2.12 U2.13 U2.14 U2.18 U2.19 U2.20 U2.21 U2.22 U2.27 U2.28 U2.29 U2.38 U2.39 U2.40 U2.41 U2.42 U2.43 U2.44 U2.45 U2.46 U3.1 U3.2 U3.4 U3.9 U3.11 U3.13 U3.16
copper on no net:
  other v3: 110,85 105,1495 1545,1495

## Polygon pours and split planes (outlines as drawn)
GND on Top Layer "GND_L01_P000" (solid, remove dead copper, pour order 0): 0,0 1985,0 1985,1590 0,1590
GND on Bottom Layer "GND_L02_P001" (solid, remove dead copper, pour order 1): 0,0 1985,0 1985,1590 0,1590

## Silkscreen, mask and mechanical layers (free items; w line width, h text height)
Top Overlay:
  text "RESET" at 840,1530.67 h60
  text "STATE" at 1690,1370.44 h40
  text "RXD" at 1730,1275 h40
  text "TXD" at 1730,1165 h40
  text "GND" at 1725,1075.52 h40
  text "BLE MODULE" at 1964.56,1000 h40 r90
  text "3V3" at 1740,970.52 h40
  text "NC" at 1745,865.48 h40
  text "stm32" at 684.33,820 h60 r90
  text "USB" at 349.33,770 h60 r90
  text "SWD" at 1755,550.67 h60
  text "GND" at 1505,390.52 h40
  text "SWCLK" at 1460,310.48 h40
  text "SWDIO" at 1460,230.52 h40
  text "3V3" at 1510,150.52 h40
  text "DC IN" at 220,115.67 h60

## Text inside footprints (layer, text, board x,y; h text height)
J1: Mechanical 1 "PCB Edge" at 47.32,897.87 h30 r270